# Altium PCB BrakePlaus2019.PcbDoc
Units mil, origin at the board's own origin, x right, y up, seen from the top; angles counter-clockwise.
Board outline 2365 x 1855 mil, 2 copper layers (Top Layer, Bottom Layer); 19 components, 15 nets, 81 pads, 12 vias.
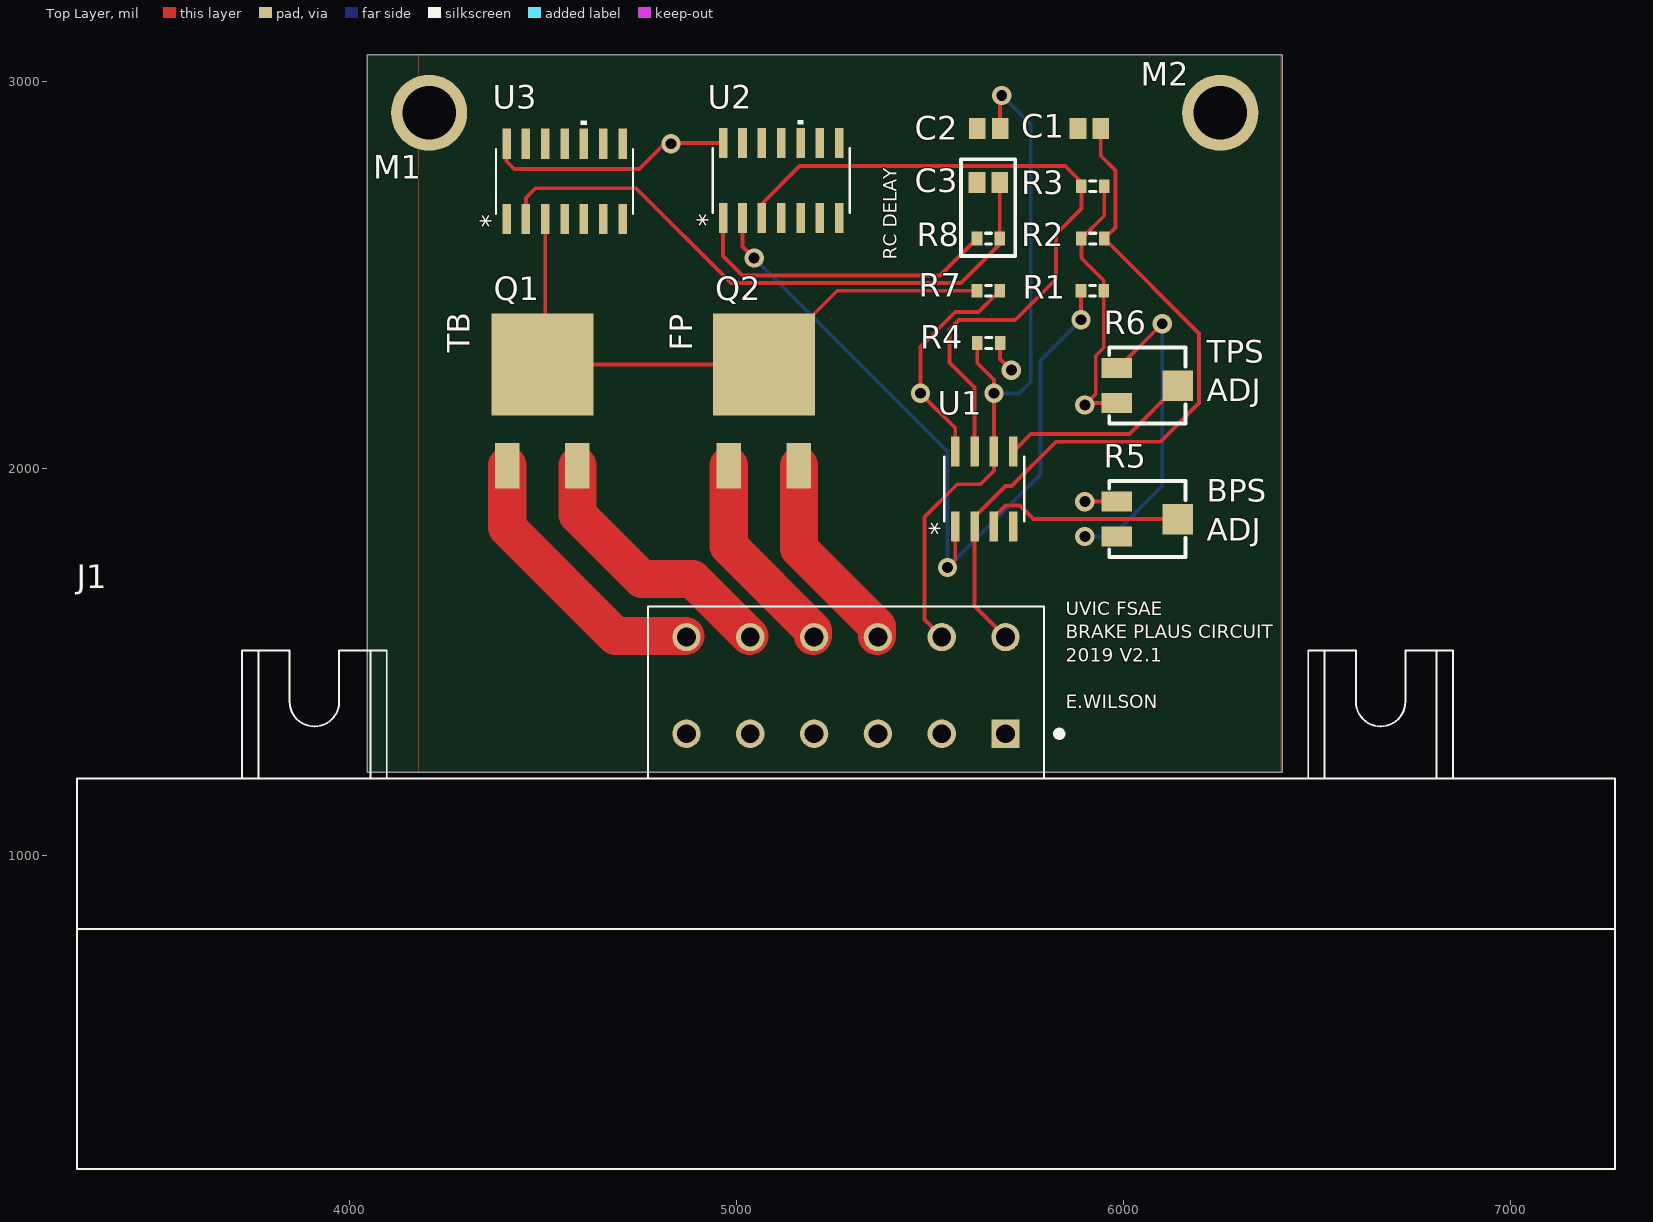
[diagram p0: Top Layer view]
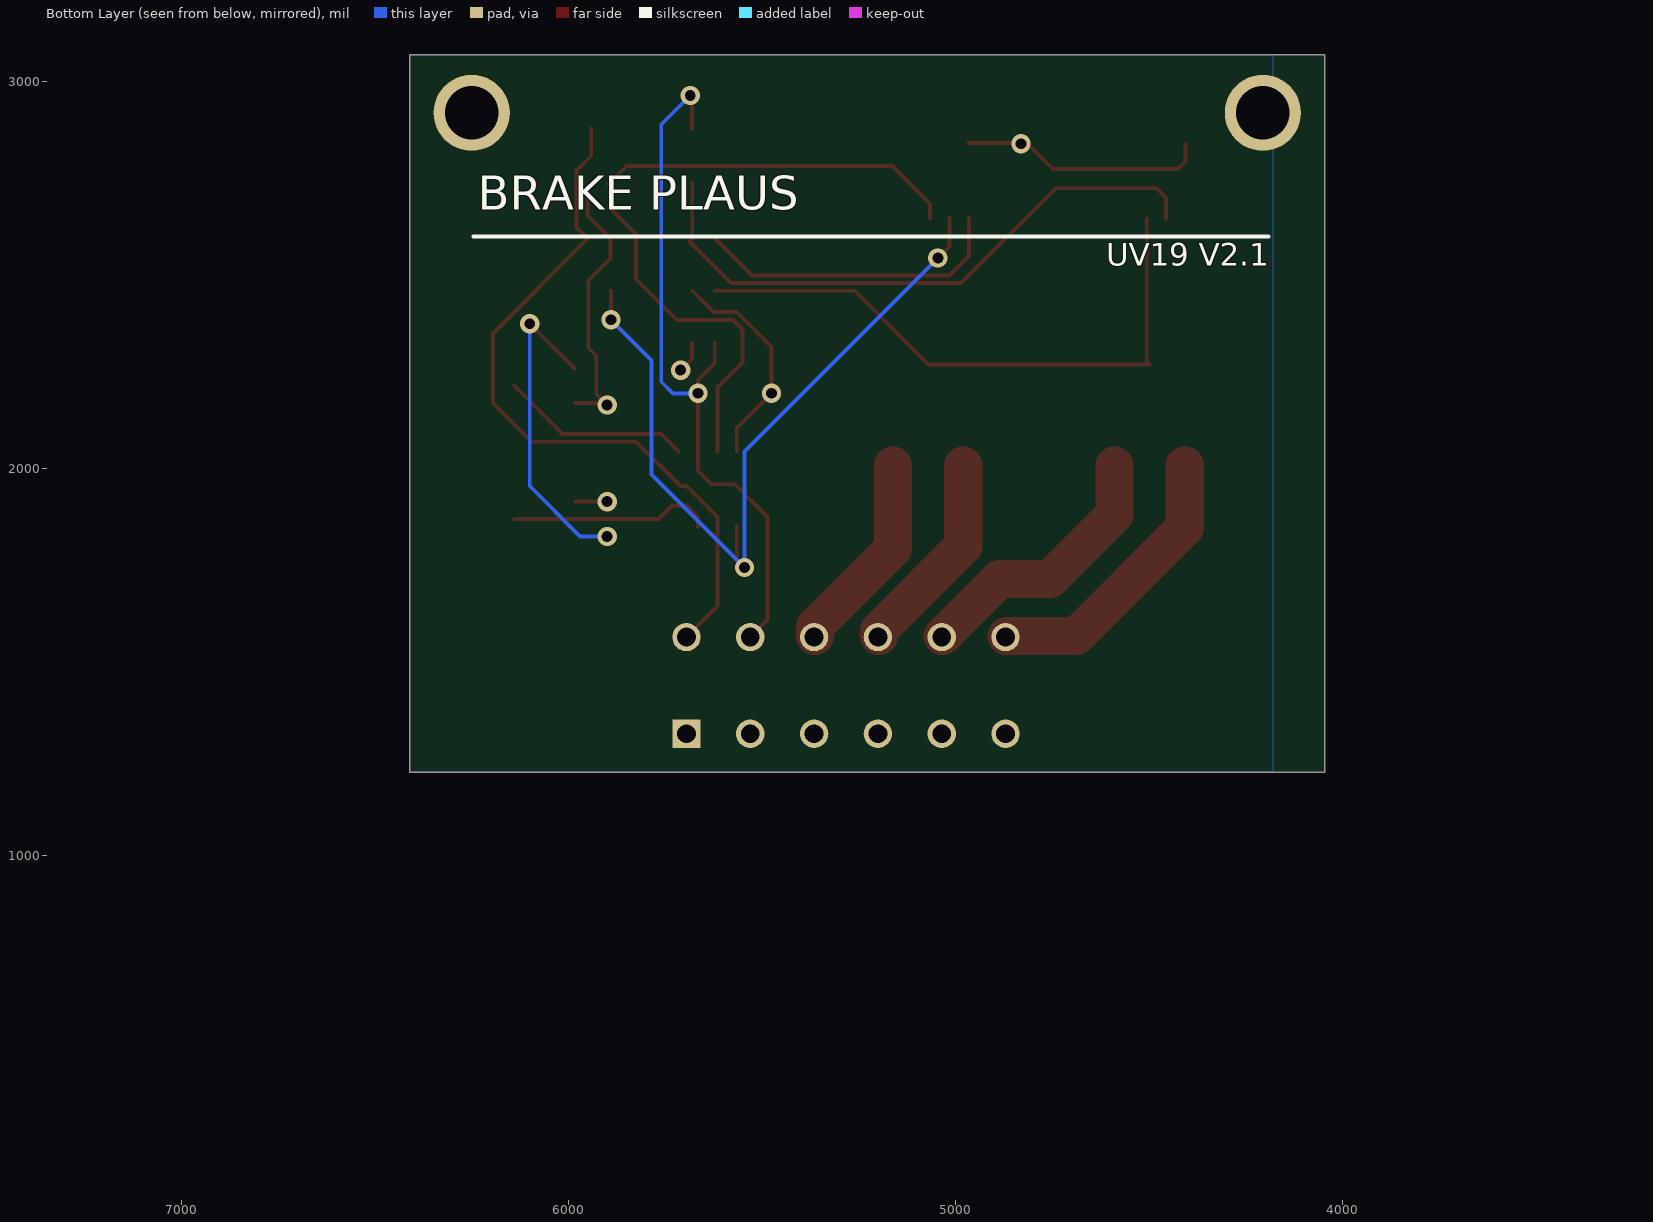
[diagram p1: Bottom Layer view, seen from below]

## Layer stack, top to bottom
Top Solder: solder mask 0.4, Solder Resist, Dk 3.5
Top Layer: signal copper 1.4
Dielectric 1: dielectric 12.6, FR-4, Dk 4.8
Bottom Layer: signal copper 1.4
Bottom Solder: solder mask 0.4, Solder Resist, Dk 3.5

## Board outline
4045,1215 6410,1215 6410,3070 4045,3070

## Design rules (kind name [scope] priority, off if disabled: settings)
Clearance [All] p1: gap=10 ignorepadtopadclearanceinfootprint=FALSE except(0: Arc-Hole Track-Hole SMDPad-Hole THPad-Hole Via-Hole Fill-Hole Poly-Hole Region-Hole Text-Hole)
PolygonConnect [All] p1: connectstyle=Relief reliefconductorwidth=10 reliefentries=4 polygonreliefangle="90 Angle" airgapwidth=10
RoutingVias [All] p1: holewidth=28 width=50 viastyle="Through Hole" minholewidth=28 minwidth=50 maxholewidth=28 maxwidth=50
SolderMaskExpansion [All] p1: expansion=4
Width [All] p1: maxlimit=10 minlimit=10 preferedwidth=10
30 further rules are at their usual default settings.

## Components (designator, comment, footprint, x,y, rotation, side; value= is the part's Value field where it differs from the comment)
C1 "Cap Pol3" C0805 5911.42,2879.57 r180 top value=.1uF
C2 "Cap Pol3" C0805 5651.42,2879.57 r180 top value=.1uF
C3 "Cap Pol3" C0805 5650.47,2740 r180 top value=100pF
J1 "DTM13-12PA-R008" *TE_DTM13-12PA-R008 5282.52,1392.17 r0 top
M1 "Mounting Hole" "M3 MOUNTING HOLE" 4205,2920 r0 top
M2 "Mounting Hole" "M3 MOUNTING HOLE" 6250,2920 r0 top
Q1 "MOSFET-N" DPAK 4497.52,2270 r270 top
Q2 "MOSFET-N" DPAK 5070,2270 r270 top
R1 "Res3" J1-0603 5919.29,2460 r0 top value=39K
R2 "Res3" J1-0603 5920.47,2595 r180 top value=39K
R3 "Res3" J1-0603 5920.47,2730 r0 top value=39K
R4 "Res3" J1-0603 5651.42,2325 r0 top value=39K
R5 "RPot SM" POT4MM-2 6061.26,1870 r0 top
R6 "RPot SM" POT4MM-2 6061.26,2215 r0 top
R7 "Res3" J1-0603 5650.47,2460 r0 top value=39K
R8 "Res3" J1-0603 5650.47,2595 r0 top value=1K
U1 "Comparator LM2903DR" D8 5640,1948 r90 top value=Value
U2 "NOR Gate SN74AHC02DR" D14 5115,2745 r90 top value=Value
U3 "Level Shifter SN74AHCT125DR" D14 4555,2743 r90 top value=Value

## Footprints (in the part's own frame and the unit in brackets; to place one, negate y for a bottom-side part, rotate by r counter-clockwise, add the part's x,y. Pads: shape width x height; smd on the part's side, far side on the other; paste and mask are expansions set on the pad)
*TE_DTM13-12PA-R008 [mm]
  rect 1.86x1.86 hole 1.24: 1(10.475,-1.96)
  round 1.86 hole 1.24: 2(6.285,-1.96) 3(2.095,-1.96) 4(-2.095,-1.96) 5(-6.285,-1.96) 6(-10.475,-1.96) 7(-10.475,4.39) 8(-6.285,4.39) 9(-2.095,4.39) 10(2.095,4.39) 11(6.285,4.39) 12(10.475,4.39)
  silkscreen extent -50.5,-30.52 50.5,6.39
C0805 [mm] "Chip Capacitor, Body 2.0x1.3mm, IPC High Density"
  rect 1.1x1.4 smd: 1(-0.75,0) 2(0.75,0)
  body extent -1.1,-0.72 1.1,0.72, height 1.4
D8 [mil]
  rect 78x22 smd paste+0 mask+0: 1(-97,75) 2(-97,25) 3(-97,-25) 4(-97,-75) 5(97,-75) 6(97,-25) 7(97,25) 8(97,75)
  silkscreen extent -84,-104 84,104, body extent 0,0 10,10, height 10
D14 [mil]
  rect 78x22 smd paste+0 mask+0: 1(-97,150) 2(-97,100) 3(-97,50) 4(-97,0) 5(-97,-50) 6(-97,-100) 7(-97,-150) 8(97,-150) 9(97,-100) 10(97,-50) 11(97,0) 12(97,50) 13(97,100) 14(97,150)
  silkscreen extent -84,-177 156,177, body extent 0,0 10,10, height 10
DPAK [mm]
  rect 3x1.6 smd: 1(6.65,2.3) 3(6.65,-2.3)
  rect 6.7x6.7 smd: 2(0,0)
J1-0603 [mm] "Chip Resistor, Body 1.6x0.8mm, IPC High Density"
  rect 0.7x0.9 smd: 1(-0.75,0) 2(0.75,0)
  silkscreen extent -0.2,-0.35 0.2,0.35, body extent -0.85,-0.48 0.85,0.48, height 0.9
"M3 MOUNTING HOLE" [mm]
  round 5 hole 3.5: M3(0,0)
POT4MM-2 [mm] "Square Trimming Potentiometer"
  rect 2x1.3 smd: CCW(-2,-1.15) CW(-2,1.15)
  rect 2x2 smd: W(2,0)
  silkscreen extent -2.5,-2.5 2.5,2.5

## Part data
C1 C2 C3: "Polarized Capacitor (Surface Mount)", LatestRevisionDate=29-May-2009, LatestRevisionNote="IPC-7351 Footprint Added.", PackageDescription="Chip Capacitor", PackageReference=C0805, Published=8-Jun-2000, Publisher="Altium Limited"
J1: "DTM Series, 4.19mm Pitch 12 Way 2 Row Right Angle PCB Header, Solder Termination", Package=None, Digi-Key_Part_Number=1734-1130-ND, Digi-Key_Purchase_URL=https://www.digikey.ca/product-detail/en/te-connectivity-deutsch-connectors/DTM13-12PA-R008/1734-1130-ND/6566694?utm_source=snapeda&utm_medium=aggregator&utm_campaign=symbol, EU_RoHS_Compliance=Compliant, MF="TE Connectivity", MP=DTM13-12PA-R008, SnapEDA_Link=https://www.snapeda.com/parts/DTM13-12PA-R008/TE%20Connectivity%20Deutsch%20Connectors/view-part/?ref=snap, TE_purchase_URL=https://www.te.com/usa-en/product-DTM13-12PA-R008.html?te_bu=Cor&te_type=disp&te_campaign=seda_glo_cor-seda-global-disp-prtnr-fy19-seda-model-bom-cta_sma-317_1&elqCampaignId=32493
M1 M2: library part "M3 Mounting Hole"
Q1 Q2: "N-Channel MOSFET", LatestRevisionDate=17-Jul-2002, LatestRevisionNote="Re-released for DXP Platform.", PackageDescription="TO, Flat Index; 3 In-Line, Axial Leads; Body Dia. 4.6mm; Lead Dia. 0.5 mm (max)", PackageReference=E3, PackageVersion=1995/1996, Published=8-Jun-2000, Publisher="Altium Limited"
R1 R2 R3 R4 R7 R8: "Resistor", LatestRevisionDate=29-May-2009, LatestRevisionNote="IPC-7351 Footprint Added.", PackageDescription="Chip Resistor", PackageReference=J1-0603, Published=8-Jun-2000, Publisher="Altium Limited"
R5 R6: "Square Trimming Potentiometer", ComponentLink1Description="Manufacturer Link", ComponentLink1URL=http://bourns.com/2/search.html, DatasheetVersion=Oct-2003, PackageDescription="Square Trimming Potentiometer", PackageReference=POT4MM-2, Published=17-Dec-2003, Publisher="Altium Limited"
U1: library part LM2903DR, "Comparator", Manufacturer="Texas Instruments", Built_By=EMA_UL_Team, Copyright="Copyright (C) 2018 Accelerated Designs. All rights reserved", Manufacturer_Part_Number=LM2903DR, RefDes=RefDes, Type=DEV, Vendor="Texas Instruments"
U2: library part "NOR Gate", "Quad 2 Input NOR Gate", Manufacturer="Texas Instruments", Manufacturer_Part_Number=SN74AHC02DR, Built_By=EMA_UL_Team, Copyright="Copyright (C) 2018 Accelerated Designs. All rights reserved", RefDes=RefDes, Type=DEV, Vendor=Vendor
U3: library part SN74AHCT125DR, "Buffer (Level Shifter)", Manufacturer="Texas Instruments", Built_By=EMA_UL_Team, Copyright="Copyright (C) 2018 Accelerated Designs. All rights reserved", Manufacturer_Part_Number=SN74AHCT125DR, RefDes=RefDes, Type=DEV, Vendor=Vendor

## Free pads (board coordinates)
  round 137.8 on Mech1 paste+0 mask+0: 5(6650,2885)

## Via types
v1: diameter 50, hole 28, Top Layer to Bottom Layer, 12 vias

## Nets (pads, with @x,y where several pads share a name; then routed paths per layer and width w, separated by ;. In a path a pad name is that pad's centre, name@x,y a point inside that pad or via, vN(x,y) a via of type N, cw(c..) or ccw(c..) an arc to the next point about the centre after c; other vN are vias at no path point)
+5: J1.1 R1.2 R2.2 R3.2 R4.2 R5.CW R6.CCW R7.2 U1.8 U2.14 U3.14 | length 2089.5
  Top Layer w10: U3.14 4405,2795 4425,2775 4748,2775 4813,2840 v1(4830,2840) 4832,2842 U2.14 ; U1.8 5565,2105 v1(5475,2195) 5475,2315 5565,2405 5625,2405 R7.2 ; R4.2 5680.94,2284.06 v1(5710,2255) ; v1(5900,1915) 5900.28,1915.28 R5.CW ; v1(5900,2165) v1@5904.72,2169.72 ; R3.2 5950,2654.06 R2.2 5890.94,2544.06 5948.82,2486.18 R1.2 5948.82,2312.75 5928.15,2292.08 5928.15,2193.15 v1@5904.72,2169.72 ; R6.CCW v1@5904.72,2169.72
BPS: C1.1 J1.12 R2.1 U1.2 | length 1880
  Top Layer w10: J1.12@5692.4,1567.83 5615,1645.24 U1.2 5615,1875 5695,1955 5710,1955 5825,2070 6094.95,2070 6195,2170.05 6195,2350 R2.1 5978.78,2623.78 5978.78,2771.22 5940.94,2809.06 C1.1
BPS_STATE: R1.1 U1.1 U2.2 | length 2094.8
  Top Layer w10: U2.2 5015,2575 v1(5045,2545) ; v1(5545,1745) 5565,1765 U1.1 ; R1.1 5889.76,2385.24 v1(5890,2385)
  Bottom Layer w10: v1(5045,2545) 5545,2045 v1(5545,1745) 5785,1985 5785,2280 v1(5890,2385)
FP_PWR_IN: J1.10 Q2.1 | length 524
  Top Layer w98.42: Q2.1 5160.55,1794.45 5362.48,1592.52 J1.10@5362.48,1567.83
FP_PWR_OUT: J1.9 Q2.3 | length 530.7
  Top Layer w98.42: Q2.3 4979.45,1800.55 5197.52,1582.48 J1.9@5197.52,1567.83
GND: C1.2 C2.2 C3.2 J1.2 R5.CCW R6.CW U1.4 U2.4 U2.5 U2.6 U2.7 U2.8 U2.9 U2.10 U2.11 U2.12 U2.13 U3.1 U3.4 U3.5 U3.6 U3.7 U3.8 U3.9 U3.10 U3.11 U3.12 U3.13 | length 838.8
  Top Layer w10: R6.CW 5985.28,2260.28 v1(6100,2375)
  Bottom Layer w10: v1(5900,1825) 5970,1825 6100,1955 v1(6100,2375)
NetR5_W: R5.W U1.3 | length 525.9
  Top Layer w10: U1.3 5665,1875 5695,1905 5732.21,1905 5767.21,1870 R5.W
NetR6_W: R6.W U1.5 | length 495.4
  Top Layer w10: U1.5 5760,2090 6015,2090 R6.W
PLAUS_STATE: R8.1 U2.1 | length 814
  Top Layer w10: U2.1 4965,2550 5015,2500 5525.94,2500 R8.1
PLAUS_STATE_DELAY: C3.1 R8.2 U3.2 | length 1598.5
  Top Layer w10: U3.2 4455,2700 4480,2725 4740,2725 4985,2480 5580,2480 5687.5,2587.5 R8.2 C3.1
PLAUS_STATE_OUT: Q1.2 Q2.2 R7.1 U3.3 | length 1581.2
  Top Layer w10: U3.3 4505,2277.48 Q1.2 Q2.2 5260,2460 R7.1
TB_PWR_IN: J1.8 Q1.1 | length 700.9
  Top Layer w98.42: Q1.1 4588.07,1881.93 4755,1715 4885.39,1715 J1.8@5032.56,1567.83
TB_PWR_OUT: J1.7 Q1.3 | length 736.8
  Top Layer w98.42: Q1.3 4406.97,1848.03 4687.17,1567.83 J1.7@4867.6,1567.83
TPS: C2.1 J1.11 R4.1 U1.6 | length 1867.9
  Top Layer w10: J1.11@5527.44,1567.83 5485,1610.28 5485,1875 5570,1960 5630,1960 5665,1995 U1.6 v1(5665,2195) 5665,2230 5621.89,2273.11 R4.1 ; C2.1 5680.94,2960.94 v1(5685,2965)
  Bottom Layer w10: v1(5665,2195) 5730,2195 5760,2225 5760,2890 v1(5685,2965)
TPS_STATE: R3.1 U1.7 U2.3 | length 1874.2
  Top Layer w10: U2.3 5065,2685 5162.56,2782.56 5849.33,2782.56 5896.42,2735.47 R3.1 5890.94,2672.28 5825,2606.34 5825,2490 5720,2385 5575,2385 5550,2360 5550,2275 5615,2210 U1.7
pads on no net: J1.3 J1.4 J1.5 J1.6 M1.M3 M2.M3

## Polygon pours and split planes (outlines as drawn)
+5 on Bottom Layer "Bottom Layer-No Net" (solid, shelved, pour order 2): 4180,3070 4180,1215 6410,1215 6410,1600 6410,3070
GND on Top Layer "Top Layer-No Net" (solid, shelved, pour order 4): 4177.5,3070 4177.5,1215 6407.5,1215 6407.5,3070

## Silkscreen, mask and mechanical layers (free items; w line width, h text height)
Top Overlay:
  lines w10: 5580,2550 5580,2780 5580,2800 5635,2800 5720,2800 5720,2780 5720,2550 5580,2550
  text "RC DELAY" at 5425,2540 h60 r90
  text "FP" at 4905,2305 h100 r90
  text "TB" at 4330,2300 h100 r90
  text "TPS / ADJ" at 6215,2155 h100
  text "BPS / ADJ" at 6215,1795 h100
  text "UVIC FSAE  / BRAKE PLAUS CIRCUIT  / 2019 V2.1 /  / E.WILSON" at 5850,1370 h60
Bottom Overlay:
  lines w10: 4190,2600 6245,2600
  text "BRAKE PLAUS" at 6235,2640 h150
  text "UV19 V2.1" at 4610,2505 h100

## Text inside footprints (layer, text, board x,y; h text height)
U1: Top Overlay "*" at 5548,1828.5 h50 r90; Mechanical 7 "0.05in/1.27mm" at 5858.5,1769.75 h25 r90; Mechanical 7 "0.05in/1.27mm" at 5602.5,1568.5 h25 r90; Mechanical 7 "0.197in/5.004mm" at 5652.5,2146.5 h25 r90; Mechanical 7 "0.244in/6.198mm" at 5371.5,1854.25 h25 r90; Mechanical 7 "0.157in/3.988mm" at 5446.5,1854.25 h25 r90; Mechanical 7 "Alt 2 Padstyle: OX90Y60D30P" at 6238.5,1610.5 h50 r90; Mechanical 7 "Alt 1 Padstyle: OX60Y90D30P" at 6178.5,1610.5 h50 r90; Mechanical 7 "Pin One Padstyle: RX78Y22D0T" at 5998.5,1598 h50 r90; Mechanical 7 "Default Padstyle: RX78Y22D0T" at 5938.5,1598 h50 r90; Mechanical 13 "*" at 5594.5,1872 h50 r90
U2: Top Overlay "*" at 4948,2625.5 h50 r90; Mechanical 7 "0.05in/1.27mm" at 5407,2566.75 h25 r90; Mechanical 7 "0.05in/1.27mm" at 5002.5,2365.5 h25 r90; Mechanical 7 "0.344in/8.738mm" at 5127.5,2943.5 h25 r90; Mechanical 7 "0.244in/6.198mm" at 4773,2651.25 h25 r90; Mechanical 7 "0.157in/3.988mm" at 4848,2651.25 h25 r90; Mechanical 7 "Alt 2 Padstyle: OX90Y60D30P" at 5787,2407.5 h50 r90; Mechanical 7 "Alt 1 Padstyle: OX60Y90D30P" at 5727,2407.5 h50 r90; Mechanical 7 "Pin One Padstyle: RX78Y22D0T" at 5547,2395 h50 r90; Mechanical 7 "Default Padstyle: RX78Y22D0T" at 5487,2395 h50 r90; Mechanical 13 "*" at 4996,2669 h50 r90
U3: Top Overlay "*" at 4388,2623.5 h50 r90; Mechanical 7 "0.05in/1.27mm" at 4847,2564.75 h25 r90; Mechanical 7 "0.05in/1.27mm" at 4442.5,2363.5 h25 r90; Mechanical 7 "0.344in/8.738mm" at 4567.5,2941.5 h25 r90; Mechanical 7 "0.244in/6.198mm" at 4213,2649.25 h25 r90; Mechanical 7 "0.157in/3.988mm" at 4288,2649.25 h25 r90; Mechanical 7 "Alt 2 Padstyle: OX90Y60D30P" at 5227,2405.5 h50 r90; Mechanical 7 "Alt 1 Padstyle: OX60Y90D30P" at 5167,2405.5 h50 r90; Mechanical 7 "Pin One Padstyle: RX78Y22D0T" at 4987,2393 h50 r90; Mechanical 7 "Default Padstyle: RX78Y22D0T" at 4927,2393 h50 r90; Mechanical 13 "*" at 4436,2667 h50 r90